# Altium PCB Mother_board.PcbDoc
Units mm, origin at the board's own origin, x right, y up, seen from the top; angles counter-clockwise.
Board outline 75 x 75 mm, 2 copper layers (Top Layer, Bottom Layer), stack 1.571 mm thick; 67 components, 46 nets, 243 pads, 37 vias.
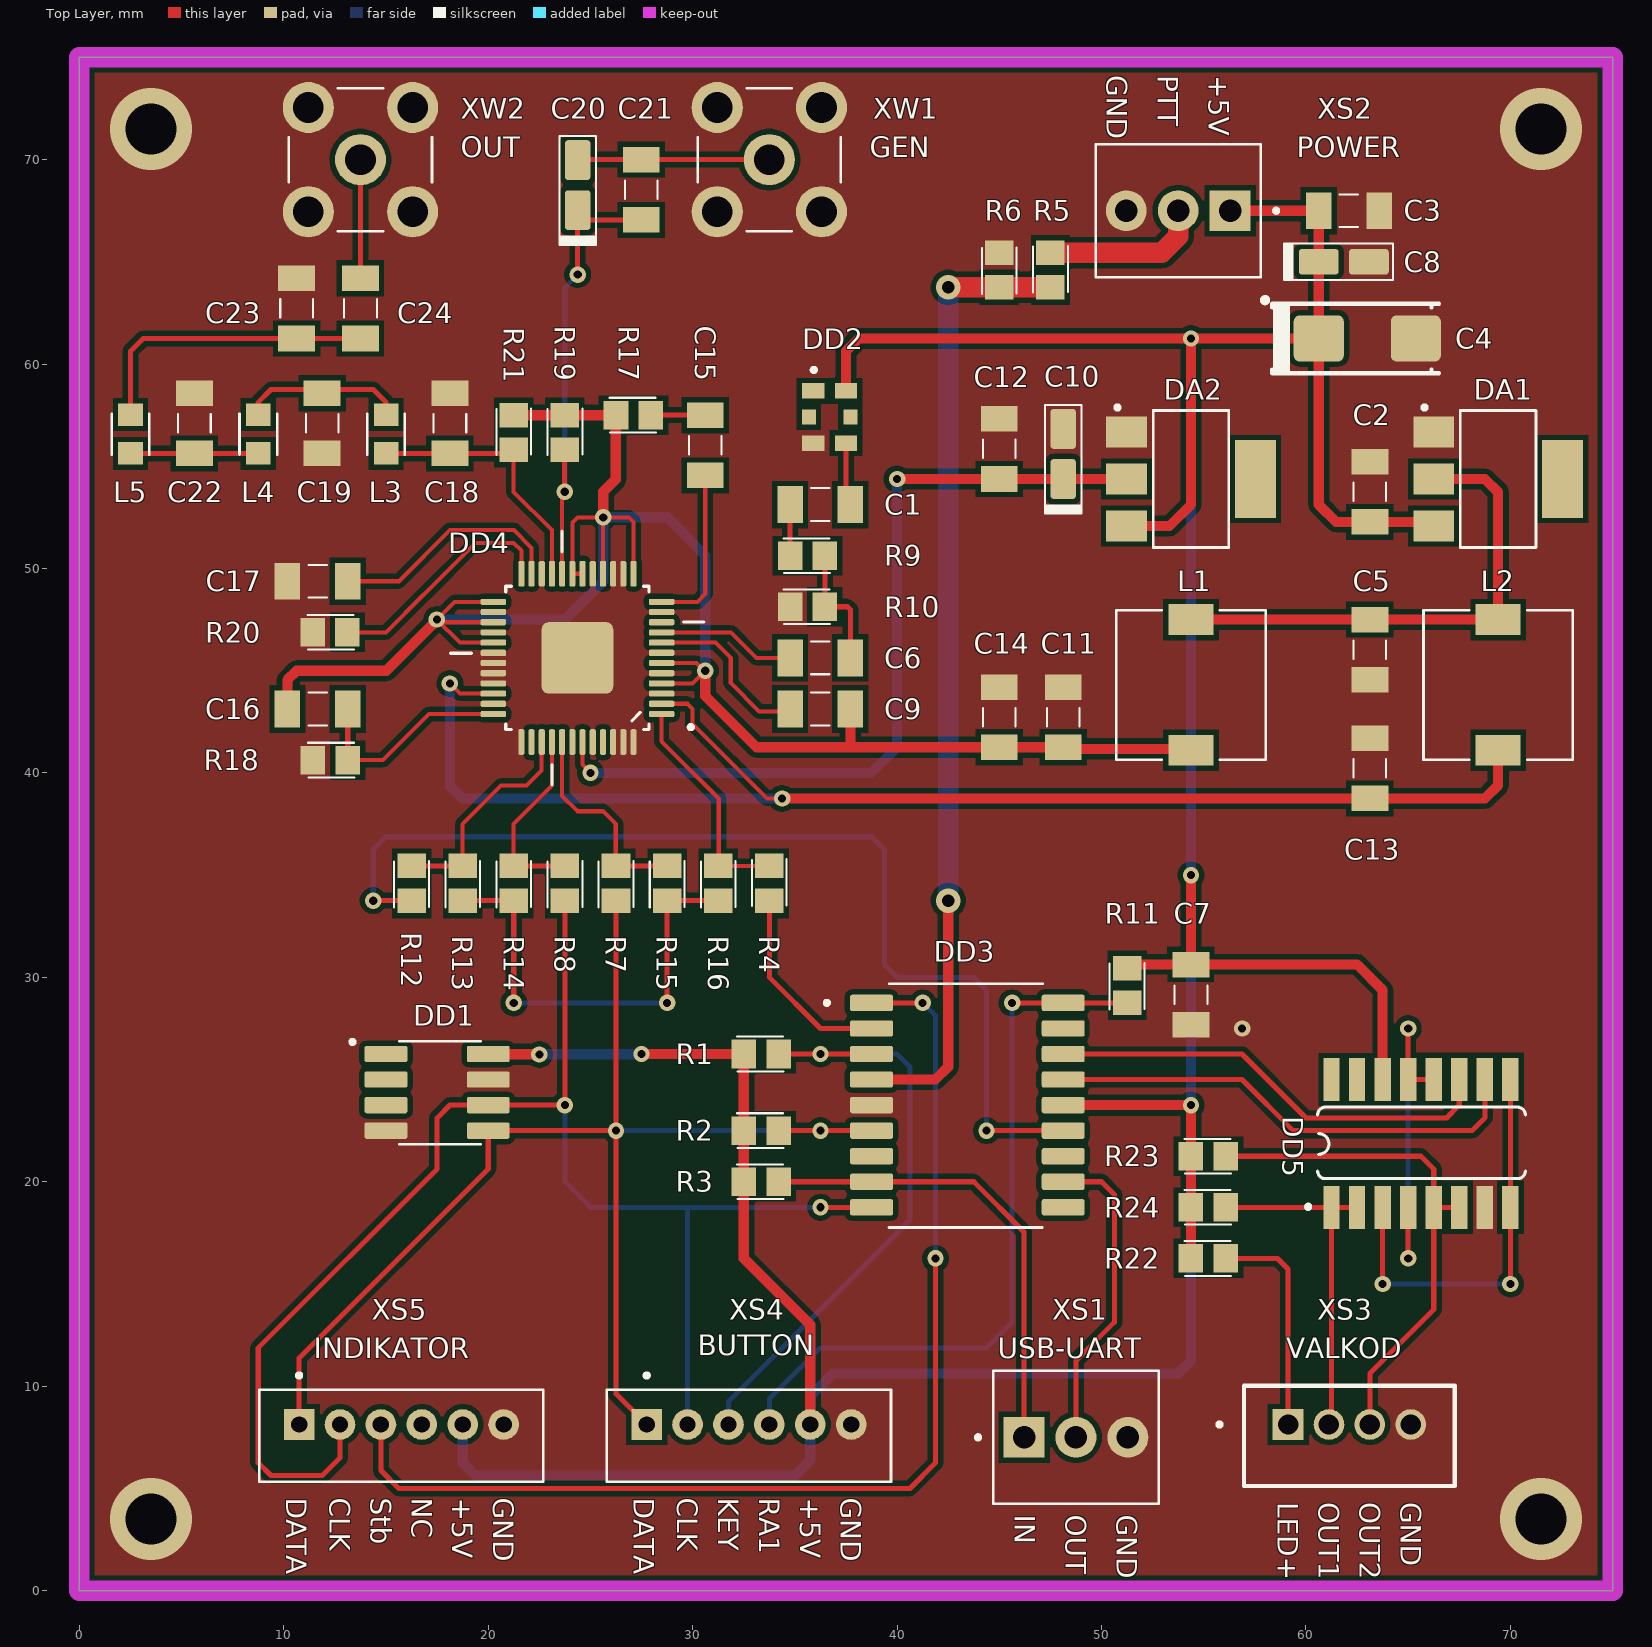
[diagram p0: Top Layer view]
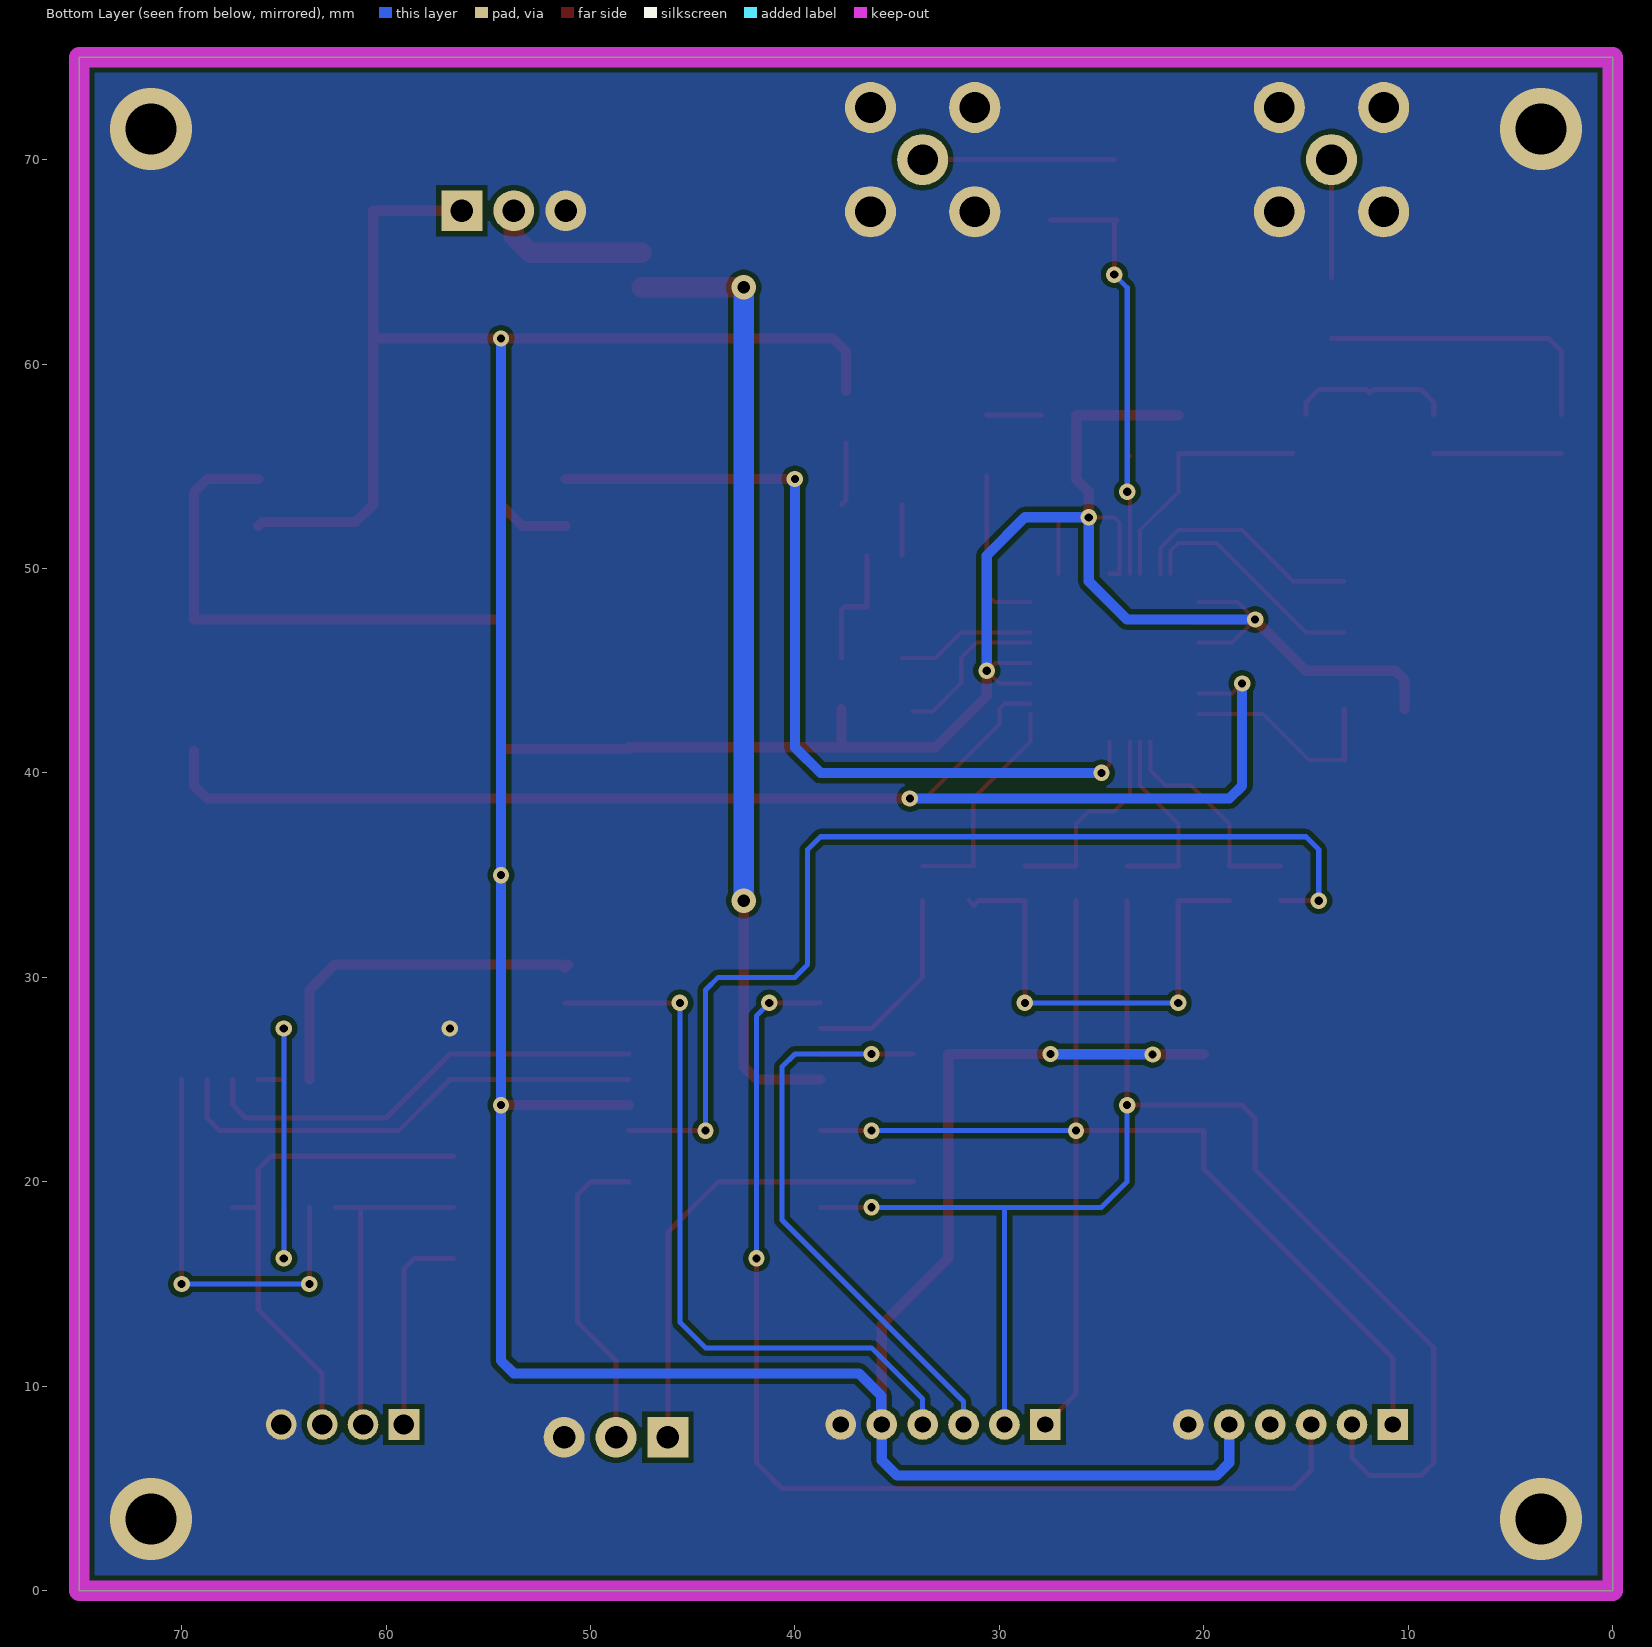
[diagram p1: Bottom Layer view, seen from below]
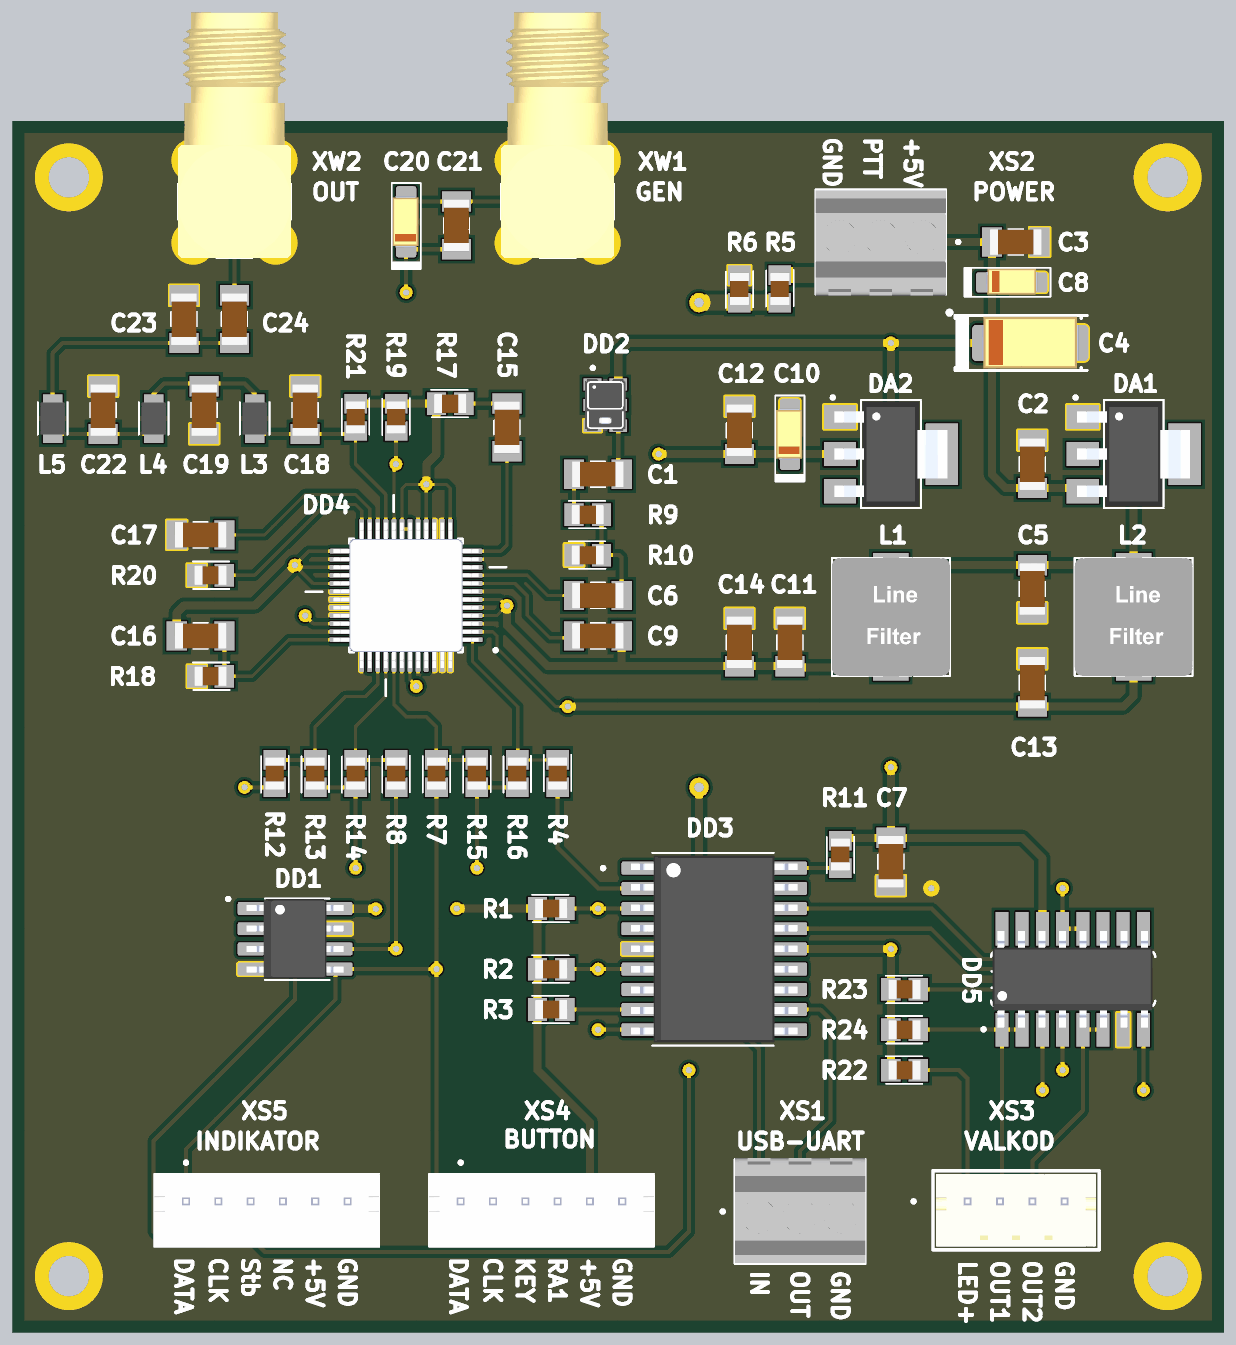
[diagram p2: 3D render of the assembled board from above, using the file's embedded part models]

## Layer stack, top to bottom
Top Solder: solder mask 0.0102, Solder Resist, Dk 3.5
Top Layer: signal copper 0.0356
Dielectric 1: dielectric 1.5, FR-4, Dk 4.8
Bottom Layer: signal copper 0.0356
Bottom Solder: solder mask 0.0102, Solder Resist, Dk 3.5

## Board outline
0,0 0,75 75,75 75,0

## Design rules (kind name [scope] priority, off if disabled: settings)
Clearance [All] p1: gap=0.125 ignorepadtopadclearanceinfootprint=FALSE except(0.25: Arc-Fill Arc-Poly Arc-Region Track-Fill Track-Poly Track-Region SMDPad-Fill SMDPad-Poly SMDPad-Region THPad-Fill THPad-Poly THPad-Region Via-Fill Via-Poly Via-Region Fill-Fill Fill-Poly Fill-Region Poly-Poly Poly-Region Region-Region)
MinimumSolderMaskSliver [All] p1: minsoldermaskwidth=0.04
PolygonConnect [All] p1: connectstyle=Direct reliefconductorwidth=0.254 reliefentries=4 polygonreliefangle="90 Angle" airgapwidth=0.254
RoutingVias [All] p1: holewidth=0.711 width=1.27 viastyle="Through Hole" minholewidth=0.711 minwidth=1.27 maxholewidth=0.711 maxwidth=1.27
SilkToSolderMaskClearance [IsPad] p1: minsilkscreentomaskgap=0.1 clearancetoexposedcopper=TRUE
SolderMaskExpansion [All] p1: expansion=0.102 istentingtop=FALSE
Width [All] p1: maxlimit=1 minlimit=0.2 preferedwidth=0.25 minimp=50.000000 maximp=50.000000 favimp=50.000000
28 further rules are at their usual default settings.

## Components (designator, comment, footprint, x,y, rotation, side; value= is the part's Value field where it differs from the comment)
C1 "cap" CAP_1206 36.239,53.125 r180 top
C2 "cap" CAP_1206 63.125,53.75 r270 top
C3 "cap" CAP_1206 62.1,67.5 r180 top
C4 "cap_E" EIA6032 63,61.25 r0 top
C5 "cap" CAP_1206 63.125,46.025 r90 top
C6 "cap" CAP_1206 36.239,45.625 r180 top
C7 "cap" CAP_1206 54.375,29.15 r270 top
C8 "cap_E" EIA3216 61.85,65 r0 top
C9 "cap" CAP_1206 36.239,43.125 r0 top
C10 "cap_E" EIA3216 48.125,55.6 r90 top
C11 "cap" CAP_1206 48.125,42.725 r270 top
C12 "cap" CAP_1206 45,55.85 r270 top
C13 "cap" CAP_1206 63.125,40.225 r270 top
C14 "cap" CAP_1206 45,42.725 r270 top
C15 "cap" CAP_1206 30.614,56.025 r90 top
C16 "cap" CAP_1206 11.65,43.125 r180 top
C17 "cap" CAP_1206 11.65,49.375 r180 top
C18 "cap" CAP_1206 18.125,57.1 r90 top
C19 "cap" CAP_1206 11.875,57.1 r270 top
C20 "cap_E" EIA3216 24.375,68.75 r90 top
C21 "cap" CAP_1206 27.489,68.525 r90 top
C22 "cap" CAP_1206 5.625,57.1 r90 top
C23 "cap" CAP_1206 10.625,62.725 r90 top
C24 "cap" CAP_1206 13.75,62.725 r90 top
DA1 "Микросхем. стаб. напря." LD1117-3.3V 69.4,54.375 r270 top
DA2 "Микросхем. стаб. напря." LD1117-3.3V 54.375,54.375 r270 top
DD1 "FM24C16B" FM24C16B 17.5,24.375 r0 top
DD2 "ETXO-H33CL" OSC_ETXO-H33CL-100.000 36.7,57.41 r270 top
DD3 "PIC16F88P" PIC16F88 38.75,28.75 r0 top
DD4 "AD9951YSVZ" AD9951YSVZ 24.364,45.625 r180 top
DD5 "74HC132D" 74HC123D 65.625,21.875 r90 top
L1 "coil" B82472G6103M000 54.375,44.3 r270 top
L2 "coil" B82472G6103M000 69.4,44.3 r270 top
L3 "coil" LQW2BHNR33K03L 15,56.575 r90 top
L4 "coil" LQW2BHNR33K03L 8.75,56.575 r270 top
L5 "coil" LQW2BHNR33K03L 2.5,56.575 r90 top
R1 "res-0.125w" res-0805-0.125 33.35,26.25 r180 top
R2 "res-0.125w" res-0805-0.125 33.35,22.5 r180 top
R3 "res-0.125w" res-0805-0.125 33.35,20 r180 top
R4 "res-0.125w" res-0805-0.125 33.75,34.6 r90 top
R5 "res-0.125w" res-0805-0.125 47.5,64.6 r90 top
R6 "res-0.125w" res-0805-0.125 45,64.6 r270 top
R7 "res-0.125w" res-0805-0.125 26.25,34.6 r270 top
R8 "res-0.125w" res-0805-0.125 23.75,34.6 r270 top
R9 "res-0.125w" res-0805-0.125 35.614,50.625 r180 top
R10 "res-0.125w" res-0805-0.125 35.614,48.125 r180 top
R11 "res-0.125w" res-0805-0.125 51.25,29.6 r270 top
R12 "res-0.125w" res-0805-0.125 16.25,34.6 r270 top
R13 "res-0.125w" res-0805-0.125 18.75,34.6 r270 top
R14 "res-0.125w" res-0805-0.125 21.25,34.6 r270 top
R15 "res-0.125w" res-0805-0.125 28.75,34.6 r270 top
R16 "res-0.125w" res-0805-0.125 31.25,34.6 r270 top
R17 "res-0.125w" res-0805-0.125 27.1,57.5 r180 top
R18 "res-0.125w" res-0805-0.125 12.275,40.625 r0 top
R19 "res-0.125w" res-0805-0.125 23.75,56.65 r90 top
R20 "res-0.125w" res-0805-0.125 12.264,46.875 r0 top
R21 "res-0.125w" res-0805-0.125 21.25,56.65 r90 top
R22 "res-0.125w" res-0805-0.125 55.225,16.25 r180 top
R23 "res-0.125w" res-0805-0.125 55.225,21.25 r180 top
R24 "res-0.125w" res-0805-0.125 55.225,18.75 r180 top
XS1 "Разьем 3 кон" ED555/3DS 48.75,7.5 r0 top
XS2 "разьем источника" ED555/3DS 53.75,67.5 r180 top
XS3 "разьем VALKOD" B4B-PH-K 62.125,8.125 r0 top
XS4 "Разьем 6 кон." B6B-PH-K-S_LS_SN 32.75,7.575 r180 top
XS5 "Разьем 6 кон." B6B-PH-K-S_LS_SN 15.75,7.575 r180 top
XW1 "Коаксиальное" HYR-1141 33.75,70 r180 top
XW2 "Коаксиальное" HYR-1141 13.75,70 r180 top

## Footprints (in the part's own frame and the unit in brackets; to place one, negate y for a bottom-side part, rotate by r counter-clockwise, add the part's x,y. Pads: shape width x height; smd on the part's side, far side on the other; paste and mask are expansions set on the pad)
74HC123D [mm]
  rect 2.1x0.8 smd: 1(-3.125,4.375) 2(-3.125,3.125) 3(-3.125,1.875) 4(-3.125,0.625) 5(-3.125,-0.625) 6(-3.125,-1.875) 7(-3.125,-3.125) 8(-3.125,-4.375) 9(3.125,-4.375) 10(3.125,-3.125) 11(3.125,-1.875) 12(3.125,-0.625) 13(3.125,0.625) 14(3.125,1.875) 15(3.125,3.125) 16(3.125,4.375)
  silkscreen extent -3.2,-5.1 1.78,5.62, body extent -3,-4.95 3,4.95, height 1.75
AD9951YSVZ [mm]
  rrect50% 1.25x0.3 smd mask+0.075: 1(-4.115,2.743) 2(-4.115,2.244) 3(-4.115,1.746) 4(-4.115,1.247) 5(-4.115,0.748) 6(-4.115,0.249) 7(-4.115,-0.249) 8(-4.115,-0.748) 9(-4.115,-1.247) 10(-4.115,-1.746) 11(-4.115,-2.244) 12(-4.115,-2.743) 25(4.115,-2.743) 26(4.115,-2.244) 27(4.115,-1.746) 28(4.115,-1.247) 29(4.115,-0.748) 30(4.115,-0.249) 31(4.115,0.249) 32(4.115,0.748) 33(4.115,1.247) 34(4.115,1.746) 35(4.115,2.244) 36(4.115,2.743)
  rrect50% 0.3x1.25 smd mask+0.075: 13(-2.743,-4.115) 14(-2.244,-4.115) 15(-1.746,-4.115) 16(-1.247,-4.115) 17(-0.748,-4.115) 18(-0.249,-4.115) 19(0.249,-4.115) 20(0.748,-4.115) 21(1.247,-4.115) 22(1.746,-4.115) 23(2.244,-4.115) 24(2.743,-4.115) 37(2.743,4.115) 38(2.244,4.115) 39(1.746,4.115) 40(1.247,4.115) 41(0.748,4.115) 42(0.249,4.115) 43(-0.249,4.115) 44(-0.748,4.115) 45(-1.247,4.115) 46(-1.746,4.115) 47(-2.244,4.115) 48(-2.743,4.115)
  rrect20% 3.505x3.505 smd: 48(0,0)
  silkscreen extent -6.2,-6.2 6.2,6.22, body extent -4.5,-4.5 4.5,4.5, height 1.18
B4B-PH-K [mm]
  rect 1.5x1.5 hole 1: 1(-3,0)
  round 1.5 hole 1: 2(-1,0) 3(1,0) 4(3,0)
  silkscreen extent -6.45,-3 5.15,1.9, body extent -4.95,-2.8 4.95,1.7, height 6
B6B-PH-K-S_LS_SN [mm]
  rect 1.5x1.5 hole 0.8: 1(5,-0.55)
  round 1.5 hole 0.8: 2(3,-0.55) 3(1,-0.55) 4(-1,-0.55) 5(-3,-0.55) 6(-5,-0.55)
  silkscreen extent -6.95,-3.05 6.95,2.25, body extent -6.95,-2.25 6.95,2.25, height 6
B82472G6103M000 [mm]
  rect 1.5x2.2 smd: 1(-3.2,0) 2(3.2,0)
  silkscreen extent -3.65,-3.65 3.65,3.65, body extent -3.7,-3.65 3.7,3.65, height 4.3
CAP_1206 [mm]
  rect 1.25x1.8 smd: 1(-1.475,0) 2(1.475,0)
  silkscreen extent -0.45,-0.8 0.45,0.8, body extent -1.6,-0.8 1.6,0.8, height 0.95
ED555/3DS [mm]
  rect 2x2 hole 1.1: 1(-2.54,0)
  round 2 hole 1.1: 2(0,0) 3(2.54,0)
  silkscreen extent -4.89,-3.25 4.04,3.25, body extent -4.04,-3.2 4.04,3.3, height 10
EIA3216 [mm]
  rrect25% 1.95x1.25 smd: 1(-1.225,0) 2(1.225,0)
  silkscreen extent -2.92,-0.91 2.4,0.9, body extent -1.6,-0.75 1.6,0.85, height 1.8
EIA6032 [mm]
  rrect25% 2.45x2.25 smd: 1(-2.375,0) 2(2.375,0)
  silkscreen extent -5.12,-1.72 3.51,2, body extent -3,-1.57 3,1.63, height 2.8
FM24C16B [mm]
  rrect25% 2.1x0.8 smd: 1(-2.5,1.875) 2(-2.5,0.625) 3(-2.5,-0.625) 4(-2.5,-1.875) 5(2.5,-1.875) 6(2.5,-0.625) 7(2.5,0.625) 8(2.5,1.875)
  silkscreen extent -4.24,-2.55 2.13,2.56, body extent -3,-2.45 3,2.45, height 1.75
HYR-1141 [mm]
  round 2.5 hole 1.5: 1(0,0) 2(-2.55,2.55) 2(-2.55,-2.55) 2(2.55,2.55) 2(2.55,-2.55)
  silkscreen extent -3.5,-3.5 3.5,3.5, body extent -3.5,-11.7 3.5,3.5, height 10
LD1117-3.3V [mm]
  rect 1.5x2 smd: 1(-2.3,-3.15) 2(0,-3.15) 3(2.3,-3.15)
  rect 3.8x2 smd: 4(0,3.15)
  silkscreen extent -3.6,-3.7 3.35,1.85, body extent -3.25,-3.5 3.25,3.5, height 1.8
LQW2BHNR33K03L [mm]
  rect 1.1x1.2 smd: 1(-0.95,0) 2(0.95,0)
  silkscreen extent -1,-0.92 1,0.92, body extent -1,-0.75 1,0.75, height 1.78
OSC_ETXO-H33CL-100.000 [mm]
  rect 0.75x1.1 smd: 1(-1.28,-0.8) 3(1.28,-0.8) 4(1.28,0.8) 6(-1.28,0.8)
  rect 0.75x0.68 smd: 2(0,-1.015) 5(0,1.015)
  silkscreen extent -2.4,-0.87 -2.2,-0.67, body extent -1.6,-1.25 1.6,1.25, height 1.7
PIC16F88 [mm]
  rrect25% 2.1x0.8 smd: 1(0,0) 2(0,-1.25) 3(0,-2.5) 4(0,-3.75) 5(0,-5) 6(0,-6.25) 7(0,-7.5) 8(0,-8.75) 9(0,-10) 10(9.375,-10) 11(9.375,-8.75) 12(9.375,-7.5) 13(9.375,-6.25) 14(9.375,-5) 15(9.375,-3.75) 16(9.375,-2.5) 17(9.375,-1.25) 18(9.375,0)
  silkscreen extent -2.29,-10.99 8.36,0.94, body extent -0.47,-10.78 9.84,0.78, height 2.64
res-0805-0.125 [mm]
  rect 1.2x1.4 smd: 1(-0.85,0) 2(0.85,0)
  silkscreen extent -1.1,-0.85 1.17,0.85, body extent -1,-0.6 1,0.6, height 0.95

## Part data
XS4 XS5: System=Connector

## Via types
v1: diameter 0.8, hole 0.4, Top Layer to Bottom Layer, 31 vias
v2: diameter 4, hole 2.5, Top Layer to Bottom Layer, 4 vias
v3: diameter 1.2, hole 0.6, Top Layer to Bottom Layer, 2 vias

## Nets (pads, with @x,y where several pads share a name; then routed paths per layer and width w, separated by ;. In a path a pad name is that pad's centre, name@x,y a point inside that pad or via, vN(x,y) a via of type N, cw(c..) or ccw(c..) an arc to the next point about the centre after c; other vN are vias at no path point)
"+3,3 В": C10.1 C12.2 DA2.2 DD4.43 | length 41.5
  Top Layer w0.2: DD4.43 24.614,40.417 25,40.031 v1(25,40)
  Top Layer w0.5: v1(40,54.375) C10.1 DA2.2
  Bottom Layer w0.5: v1(25,40) 38.75,40 40,41.25 v1(40,54.375)
"+5 В": C2.2 C3.2 C4.1 C7.1 C8.1 DA1.3 DA2.3 DD1.8 DD2.6 DD3.14 DD5.14 R1.2 R2.2 R3.2 R11.1 R22.2 R23.2 R24.2 XS2.1 XS4.5 XS5.5 | length 221.5
  Top Layer w0.5: DD1.8 20.012,26.238 22.487,26.238 v1(22.5,26.225) ; v1(27.5,26.25) R1.2 R2.2 R3.2 32.5,16.25 35.75,13 XS4.5 ; DD2.6 37.5,60.625 38.125,61.25 v1(54.375,61.25) ; DD3.14 v1(54.375,23.75) R23.2 R24.2 R22.2 ; R11.1@51.075,30.625 R11.1 51.425,30.625 C7.1 ; DA2.3 53.325,52.075 54.375,53.125 v1(54.375,61.25) ; v1(54.375,35) C7.1 ; XS2.1 C3.2 60.625,65.625 C8.1 C4.1 ; DD5.14 63.75,29.375 62.5,30.625 C7.1 ; DA1.3 66.05,52.275 C2.2 61.475,52.275 60.625,53.125 C4.1 ; v1(54.375,61.25) C4.1
  Bottom Layer w0.5: XS5.5 18.75,6.25 19.375,5.625 35,5.625 35.75,6.375 XS4.5 35.775,8.15 35.775,9.525 36.875,10.625 53.75,10.625 54.375,11.25 v1(54.375,23.75) v1(54.375,35) v1(54.375,61.25) ; v1(22.5,26.225) 22.513,26.238 27.488,26.238 v1(27.5,26.25)
AVDD: C9.2 C11.2 C14.2 C16.2 DD4.4 DD4.6 DD4.13 DD4.16 DD4.18 DD4.19 DD4.25 DD4.27 DD4.29 L1.2 R17.2 R19.2 R21.2 | length 96.4
  Top Layer w0.2: v1@17.5,47.489 18.616,46.373 DD4.29 ; DD4.27 17.781,47.371 17.652,47.5 v1(17.489,47.5) 18.357,48.368 DD4.25 ; DD4.18 DD4.19 24.115,49.95 24.165,50 24.12,50.045 24.12,52.245 24.375,52.5 v1@25.611,52.5 ; DD4.16 v1@25.611,52.5 ; DD4.13 27.107,52.268 26.875,52.5 v1(25.625,52.5) v1@25.611,52.5 ; DD4.4 29.992,44.378 v1(30.614,45) 30.573,45 30.197,45.376 DD4.6
  Top Layer w0.25: v1(17.489,47.5) v1@17.5,47.489
  Top Layer w0.5: C16.2 10.175,44.55 10.625,45 15.011,45 v1@17.5,47.489 ; R21.2 R19.2 R17.2@26.239,57.5 ; v1(25.625,52.5) 25.625,53.75 26.239,54.364 R17.2@26.239,57.263 ; v1(30.614,45) 30.614,43.761 33.125,41.25 37.421,41.25 C14.2 C11.2@48.098,41.25 ; 37.714,41.543 C9.2 ; C11.2@48.125,41.175 L1.2@54.375,41.175
  Bottom Layer w0.5: v1(17.489,47.5) 23.75,47.5 25.625,49.375 v1(25.625,52.5) 28.75,52.5 30.614,50.636 v1(30.614,45)
CSq: DD4.39 R12.1 R13.1 | length 10.9
  Top Layer w0.2: R13.1@18.739,35.45 18.739,37.489 20.625,39.375 21.864,39.375 22.613,40.124 22.613,41.505 DD4.39
  Top Layer w0.25: R12.1 18.739,35.45 R13.1
DVDD: C13.2 DD4.2 DD4.34 L2.2 | length 69.1
  Top Layer w0.2: v1(18.125,44.375) 18.621,43.879 DD4.34 ; DD4.2 29.744,43.381 30,43.125 30,42.381 33.631,38.75 v1(34.375,38.75)
  Top Layer w0.5: v1(34.375,38.75) C13.2 68.75,38.75 69.4,39.4 L2.2
  Bottom Layer w0.5: v1(18.125,44.375) 18.125,39.375 18.75,38.75 v1(34.375,38.75)
GND: C2.1 C3.1 C4.2 C5.1 C7.2 C8.2 C10.2 C11.1 C12.1 C13.1 C14.1 C17.2 C18.2 C19.2 C22.2 C23.2 DA1.1 DA2.1 DD1.4 DD1.7 DD2.3 DD3.5 DD4.3 DD4.5 DD4.7 DD4.11 DD4.14 DD4.15 DD4.17 DD4.22 DD4.26 DD4.28 DD4.30 DD4.31 DD4.32 DD4.33 DD4.35 DD4.37 DD4.42 DD4.44 DD4.46 DD4.47 DD4.48 DD5.7 R6.1 R10.2 R18.1 R20.1 XS1.3 XS2.3 XS3.4 XS4.6 XS5.6 XW1.2 XW2.2
  other v1: 56.875,27.5
  other v2: 3.5,3.5 71.5,3.5 3.5,71.5 71.5,71.5
KEY: DD3.3 R1.1 XS4.3 | length 30.4
  Top Layer w0.25: R1.1 v1(36.25,26.25) DD3.3
  Bottom Layer w0.25: XS4.3 31.75,9.25 40.625,18.125 40.625,25.625 40,26.25 v1(36.25,26.25)
NetC1_1: C1.1 DD2.4 | length 3.1
  Top Layer w0.25: DD2.4 37.5,53.339 C1.1
NetC1_2: C1.2 R9.2 | length 2.5
  Top Layer w0.25: R9.2 C1.2
NetC5_2: C5.2 DA1.2 L1.1 L2.1 | length 24.7
  Top Layer w0.5: L1.1@54.375,47.575 54.45,47.5 C5.2 L2.1 69.4,53.725 68.75,54.375 DA1.2
NetC6_1: C6.1 R9.1 R10.1 | length 6.2
  Top Layer w0.25: R9.1 R10.1 37.568,48.125 37.714,47.979 C6.1
NetC6_2: C6.2 DD4.9 | length 6.8
  Top Layer w0.2: DD4.9 31.867,46.872 33.114,45.625 C6.2
NetC9_1: C9.1 DD4.8 | length 7.9
  Top Layer w0.2: DD4.8 31.116,46.373 31.864,45.625 31.864,44.392 33.244,43.012 C9.1@34.252,43.012
NetC15_1: C15.1 DD4.12 | length 8.1
  Top Layer w0.2: DD4.12 30.232,48.368 30.614,48.75 C15.1
NetC15_2: C15.2 R17.1 | length 2.7
  Top Layer w0.25: R17.1@27.939,57.5 C15.2
NetC16_1: C16.1 DD4.36 R18.2 | length 10.6
  Top Layer w0.2: R18.2 14.851,40.625 17.107,42.882 DD4.36
  Top Layer w0.25: R18.2 C16.1
NetC17_1: C17.1 DD4.23 | length 11.7
  Top Layer w0.2: C17.1 15.625,49.375 18.125,51.875 21.25,51.875 22.12,51.005 DD4.23
NetC18_1: C18.1 DD4.21 L3.1 R21.1 | length 12.3
  Top Layer w0.2: R21.1@21.239,55.625 21.239,53.75 23.114,51.875 23.114,49.743 DD4.21
  Top Layer w0.25: 15.639,55.625 C18.1 R21.1@21.239,55.625
NetC19_1: C19.1 L3.2 L4.1 | length 8.1
  Top Layer w0.25: L4.1 8.75,58.125 9.375,58.75 11.7,58.75 C19.1 12.05,58.75 14.375,58.75 15,58.125 L3.2
NetC20_1: C20.1 C21.1 DD4.20 R19.1 | length 23
  Top Layer w0.2: DD4.20 23.616,53.465 23.739,53.588 v1(23.739,53.75) ; R19.1@23.616,55.502 R19.1@23.739,55.625
  Top Layer w0.25: v1(23.739,53.75) R19.1@23.739,55.625 ; v1(24.375,64.375) 24.375,66.923 24.248,67.05 C21.1
  Bottom Layer w0.25: v1(23.739,53.75) 23.745,53.755 23.745,63.733 24.375,64.363 v1(24.375,64.375)
NetC20_2: C20.2 C21.2 XW1.1 | length 9.4
  Top Layer w0.25: C20.2@24.364,69.975 24.389,70 XW1.1
NetC22_1: C22.1 L4.2 L5.1 | length 6.3
  Top Layer w0.25: L5.1 C22.1 L4.2
NetC23_1: C23.1 C24.1 L5.2 | length 14.6
  Top Layer w0.25: L5.2 2.5,60.625 3.125,61.25 C23.1 C24.1
NetC24_2: C24.2 XW2.1 | length 5.8
  Top Layer w0.25: C24.2 XW2.1
NetDD3_2: DD3.2 R4.1 | length 9.8
  Top Layer w0.25: R4.1 33.75,30 36.25,27.5 DD3.2
NetDD3_8: DD3.8 R3.1 XS1.1 | length 23.1
  Top Layer w0.25: R3.1 DD3.8 43.75,20 46.21,17.54 XS1.1 XS1.1@46.25,7.54
NetDD3_11: DD3.11 XS1.2 | length 15.4
  Top Layer w0.25: DD3.11 50,20 50.625,19.375 50.625,13.125 48.75,11.25 XS1.2
NetDD3_13: DD3.13 R12.2 | length 51.7
  Top Layer w0.25: v1(14.375,33.75) R12.2 ; v1(44.375,22.5) DD3.13
  Bottom Layer w0.25: v1(14.375,33.75) 14.375,36.25 15,36.875 38.75,36.875 39.375,36.25 39.375,30.625 40,30 43.75,30 44.375,29.375 v1(44.375,22.5)
NetDD4_1: DD4.1 R4.2 R16.1 | length 11.1
  Top Layer w0.2: DD4.1 28.479,41.546 31.275,38.75 R16.1@31.275,35.45 ; R16.1 R16.1@31.275,35.45 ; R4.2 R16.1@31.275,35.45
NetDD4_24: DD4.24 R20.2 | length 11.6
  Top Layer w0.2: R20.2 14.989,46.875 16.87,48.755 16.88,48.755 19.375,51.25 21.239,51.25 21.621,50.868 DD4.24
NetDD4_40: DD4.40 R8.1 R14.1 | length 9.3
  Top Layer w0.2: R14.1@21.239,35.45 21.239,37.5 23.117,39.378 DD4.40
  Top Layer w0.25: R14.1 R8.1
NetDD4_41: DD4.41 R7.1 R15.1 | length 10.4
  Top Layer w0.2: DD4.41 23.616,38.873 24.364,38.125 25.614,38.125 26.239,37.5 R7.1@26.239,35.45
  Top Layer w0.25: R7.1 R15.1
NetDD5_1: DD5.1 DD5.2 R24.1 XS3.2 | length 16.5
  Top Layer w0.25: 56.7,18.75 DD5.1 ; XS3.2 61.25,8.25 DD5.1 ; DD5.2 DD5.1
NetDD5_3: DD5.3 DD5.8 DD5.9 | length 20
  Top Layer w0.25: v1(63.75,15) DD5.3 ; v1(70,15) DD5.8 DD5.9
  Bottom Layer w0.25: v1(63.75,15) v1(70,15)
NetDD5_4: DD5.4 DD5.12 DD5.13 | length 17.5
  Top Layer w0.25: v1(65,16.25) DD5.4 ; v1(65,27.5) DD5.13 DD5.12
  Bottom Layer w0.25: v1(65,16.25) v1(65,27.5)
NetDD5_5: DD5.5 DD5.6 R23.1 XS3.3 | length 24.9
  Top Layer w0.25: 56.7,21.25 65.625,21.25 66.25,20.625 DD5.5 ; XS3.3 63.125,10.625 66.25,13.75 DD5.5 ; DD5.6 DD5.5
NetR5_2: R5.2 XS2.2 | length 7.8
  Top Layer w1: R5.2 52.95,65.45 53.75,66.25 XS2.2
NetR13_2: R13.2 R14.2 R15.2 R16.2 | length 22.9
  Top Layer w0.25: R13.2 R14.2 v1(21.25,28.75) ; v1(28.75,28.75) R15.2 31.025,33.75 31.25,33.525 R16.2@31.475,33.75
  Bottom Layer w0.25: v1(21.25,28.75) v1(28.75,28.75)
NetR22_1: R22.1 XS3.1 | length 10.8
  Top Layer w0.25: 56.7,16.25 58.604,16.25 59.125,15.729 XS3.1 XS3.1@58.75,8.5
PTT: DD3.4 R5.1 R6.2 | length 47.1
  Top Layer w0.5: DD3.4 41.875,25 42.5,25.625 v3(42.5,33.75)
  Top Layer w1: v3(42.5,63.75) R6.2 47.425,63.75 R5.1
  Bottom Layer w1: v3(42.5,33.75) v3(42.5,63.75)
RA1: DD3.18 R11.2 XS4.4 | length 35.9
  Top Layer w0.25: v1(45.625,28.75) DD3.18 R11.2
  Bottom Layer w0.25: XS4.4 33.75,9.375 36.25,11.875 44.375,11.875 45.625,13.125 v1(45.625,28.75)
RA6: DD3.15 DD5.10 | length 23.8
  Top Layer w0.25: DD3.15 56.875,25 59.375,22.5 68.125,22.5 68.75,23.125 DD5.10
RA7: DD3.16 DD5.11 | length 22.2
  Top Layer w0.25: DD3.16 56.875,26.25 60,23.125 66.875,23.125 67.5,23.75 DD5.11
SCL: DD1.6 DD3.9 R8.2 XS4.2 XS5.2 | length 73.1
  Top Layer w0.25: XS5.2 12.75,6.5 11.875,5.625 9.375,5.625 8.75,6.25 8.75,11.875 17.5,20.625 17.5,23.125 18.125,23.75 DD1.6 v1(23.75,23.75) R8.2 ; v1(36.25,18.75) DD3.9
  Bottom Layer w0.25: v1(23.75,23.75) 23.75,20 25,18.75 29.75,18.75 ; XS4.2 29.75,18.75 ; v1(36.25,18.75) 29.75,18.75
SDA: DD1.5 DD3.6 R2.1 R7.2 XS4.1 XS5.1 | length 65.3
  Top Layer w0.25: XS5.1 10.75,11.375 20,20.625 DD1.5 v1(26.25,22.5) ; R7.2 v1(26.25,22.5) ; XS4.1 26.25,9.625 v1(26.25,22.5) ; R2.1 v1(36.25,22.5) DD3.6
  Bottom Layer w0.25: v1(26.25,22.5) v1(36.25,22.5)
Stb: DD3.1 XS5.3 | length 55.5
  Top Layer w0.25: XS5.3 14.75,5.875 15.625,5 40.625,5 41.875,6.25 v1(41.875,16.25) ; DD3.1 v1(41.25,28.75)
  Bottom Layer w0.25: v1(41.25,28.75) 41.875,28.125 v1(41.875,16.25)
pads on no net: DA1.4 DA2.4 DD1.1 DD1.2 DD1.3 DD2.1 DD2.2 DD2.5 DD3.7 DD3.10 DD3.12 DD3.17 DD4.10 DD4.38 DD4.45 DD5.15 DD5.16 XS5.4

## Polygon pours and split planes (outlines as drawn)
GND on Bottom Layer "NONET_L01_P-001" (solid, remove dead copper, pour order 1): 0,75 75,75 75,0 0,0
GND on Top Layer "NONET_L01_P-001" (solid, remove dead copper, pour order 0): 0,75 75,75 75,0 0,0

## Keep-outs
Keep-Out Layer:
  the board outline again, w1

## Silkscreen, mask and mechanical layers (free items; w line width, h text height)
Top Overlay:
  text "GND" at 50.254,74.121 h1 r270
  text "PTT" at 52.754,74.121 h1 r270
  text "+5V" at 55.254,74.121 h1 r270
  text "OUT" at 18.667,70.125 h1
  text "GEN" at 38.667,70.125 h1
  text "POWER" at 59.542,70.125 h1
  text "BUTTON" at 30.254,11.504 h1
  text "INDIKATOR" at 11.46,11.375 h1
  text "USB-UART" at 44.918,11.375 h1
  text "DATA" at 10.125,4.541 h1 r270
  text "CLK" at 12.25,4.541 h1 r270
  text "Stb" at 14.25,4.541 h1 r270
  text "NC" at 16.25,4.541 h1 r270
  text "+5V" at 18.25,4.541 h1 r270
  text "GND" at 20.25,4.541 h1 r270
  text "DATA" at 27.125,4.541 h1 r270
  text "CLK" at 29.25,4.541 h1 r270
  text "KEY" at 31.25,4.541 h1 r270
  text "RA1" at 33.25,4.541 h1 r270
  text "+5V" at 35.25,4.541 h1 r270
  text "GND" at 37.25,4.541 h1 r270
  text "LED+" at 58.625,4.333 h1 r270
  text "OUT1" at 60.625,4.333 h1 r270
  text "OUT2" at 62.625,4.333 h1 r270
  text "GND" at 64.625,4.333 h1 r270
  text "IN" at 45.75,3.708 h1 r270
  text "OUT" at 48.25,3.708 h1 r270
  text "GND" at 50.75,3.708 h1 r270

## Text inside footprints (layer, text, board x,y; h text height)
XS3: Top Overlay "VALKOD" at 59.043,11.375 h1